# Altium PCB PCB1 MK2.PcbDoc
Units mil, origin at the board's own origin, x right, y up, seen from the top; angles counter-clockwise.
Board outline 2700 x 3875 mil, 2 copper layers (Top Layer, Bottom Layer); 17 components, 38 nets, 80 pads, 0 vias.
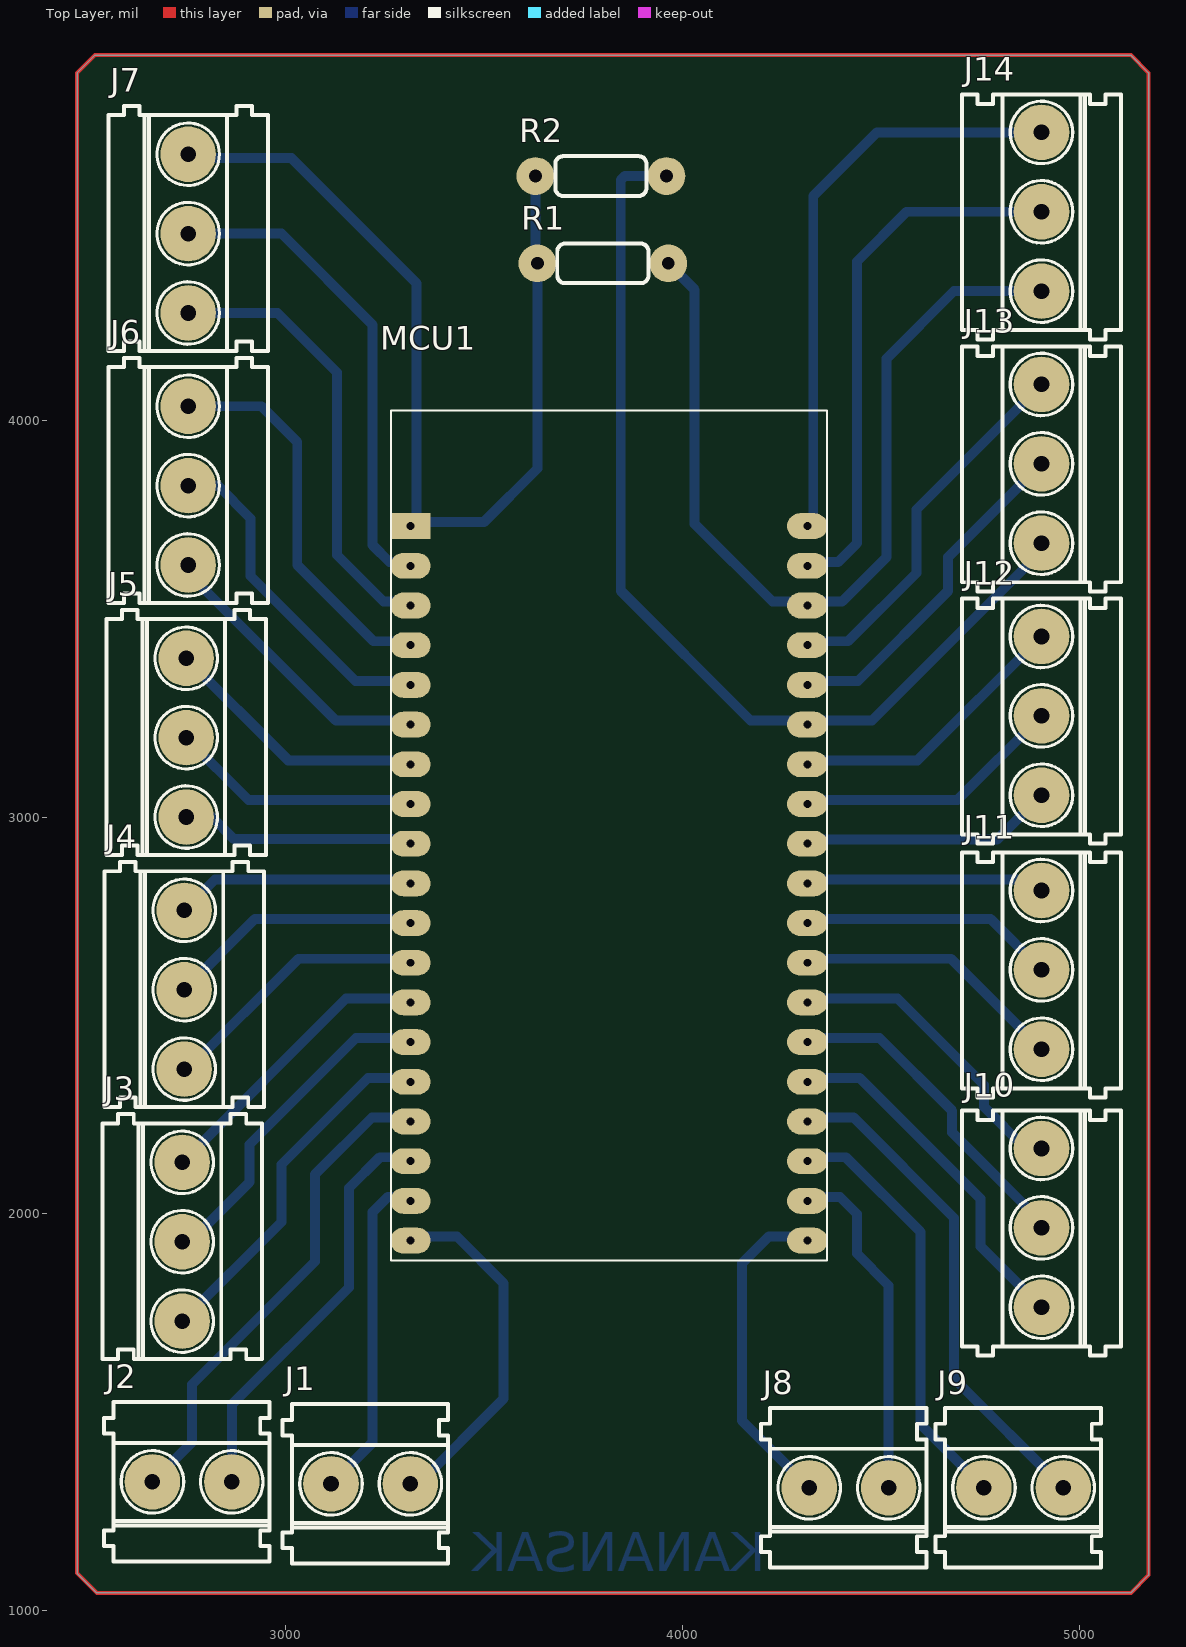
[diagram p0: Top Layer view]
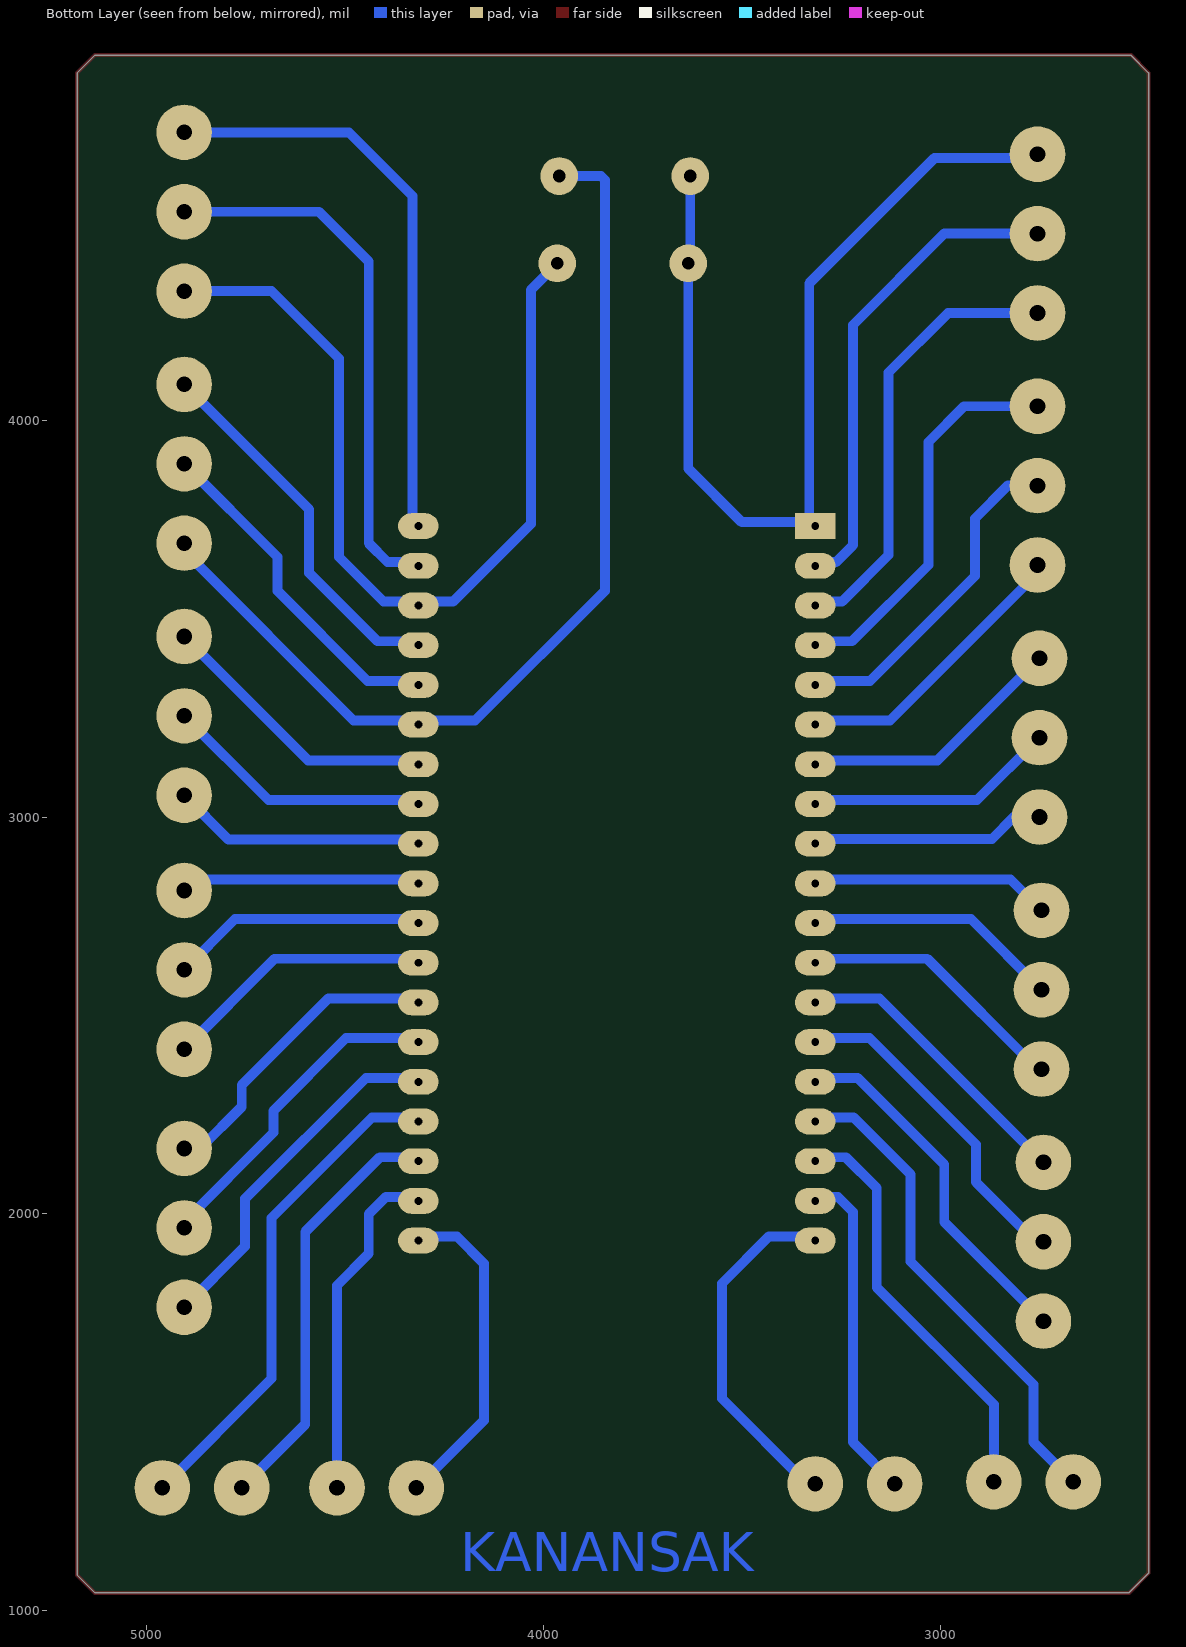
[diagram p1: Bottom Layer view, seen from below]

## Layer stack, top to bottom
Top Solder: solder mask 0.4, Solder Resist, Dk 3.5
Top Layer: signal copper 1.4
Dielectric 1: dielectric 12.6, FR-4, Dk 4.8
Bottom Layer: signal copper 1.4
Bottom Solder: solder mask 0.4, Solder Resist, Dk 3.5

## Board outline
2475,1095 2475,4875 2520,4920 5130,4920 5175,4875 5175,1090 5130,1045 2525,1045

## Design rules (kind name [scope] priority, off if disabled: settings)
Clearance [All] p1: gap=10 ignorepadtopadclearanceinfootprint=FALSE except(0: Arc-Hole Track-Hole SMDPad-Hole THPad-Hole Via-Hole Fill-Hole Poly-Hole Region-Hole Text-Hole)
PolygonConnect [All] p1: connectstyle=Relief reliefconductorwidth=10 reliefentries=4 polygonreliefangle="90 Angle" airgapwidth=10
RoutingLayers [All] p1: top layer_v5=FALSE bottom layer_v5=TRUE
RoutingVias [All] p1: holewidth=28 width=50 viastyle="Through Hole" minholewidth=28 minwidth=50 maxholewidth=28 maxwidth=50
SolderMaskExpansion [All] p1: expansion=4
Width [All] p1: maxlimit=30 minlimit=20 preferedwidth=25 minimp=50.000000 maximp=50.000000 favimp=50.000000
29 further rules are at their usual default settings.

## Components (designator, comment, footprint, x,y, rotation, side; value= is the part's Value field where it differs from the comment)
J1 "" "TB_200Mil 2 P" 3115,1320 r0 top
J2 "" "TB_200Mil 2 P" 2665,1325 r0 top
J3 "" "TB_200Mil 3 P" 2740,2130 r270 top
J4 "" "TB_200Mil 3 P" 2745,2765 r270 top
J5 "" "TB_200Mil 3 P" 2750,3400 r270 top
J6 "" "TB_200Mil 3 P" 2755,4035 r270 top
J7 "" "TB_200Mil 3 P" 2755,4670 r270 top
J8 "" "TB_200Mil 2 P" 4320,1310 r0 top
J9 "" "TB_200Mil 2 P" 4760,1310 r0 top
J10 "" "TB_200Mil 3 P" 4905,1765 r90 top
J11 "" "TB_200Mil 3 P" 4905,2415 r90 top
J12 "" "TB_200Mil 3 P" 4905,3055 r90 top
J13 "" "TB_200Mil 3 P" 4905,3690 r90 top
J14 "" "TB_200Mil 3 P" 4905,4325 r90 top
MCU1 "ESP32-DEVKITC-32D" MODULE_ESP32-DEVKITC-32D 3815,2955 r0 top
R1 "4.7K" 4.7K 3965,4395 r180 top
R2 "4.7K" 4.7K 3960,4615 r180 top

## Footprints (in the part's own frame and the unit in brackets; to place one, negate y for a bottom-side part, rotate by r counter-clockwise, add the part's x,y. Pads: shape width x height; smd on the part's side, far side on the other; paste and mask are expansions set on the pad)
4.7K [mil]
  round 95 hole 32: 1(0,0) 2(330,0)
  silkscreen extent 50,-50 280,50, body extent -47,-48 377,50, height 38
MODULE_ESP32-DEVKITC-32D [mil]
  rect 101.81x65 hole 20: 1(-500,777.95)
  oval 101.81x65 hole 20: 2(-500,677.95) 3(-500,577.95) 4(-500,477.95) 5(-500,377.95) 6(-500,277.95) 7(-500,177.95) 8(-500,77.95) 9(-500,-22.05) 10(-500,-122.05) 11(-500,-222.05) 12(-500,-322.05) 13(-500,-422.05) 14(-500,-522.05) 15(-500,-622.05) 16(-500,-722.05) 17(-500,-822.05) 18(-500,-922.05) 19(-500,-1022.05) 20(500,777.95) 21(500,677.95) 22(500,577.95) 23(500,477.95) 24(500,377.95) 25(500,277.95) 26(500,177.95) 27(500,77.95) 28(500,-22.05) 29(500,-122.05) 30(500,-222.05) 31(500,-322.05) 32(500,-422.05) 33(500,-522.05) 34(500,-622.05) 35(500,-722.05) 36(500,-822.05) 37(500,-922.05) 38(500,-1022.05)
  silkscreen extent -549,-1073 549,1069, body extent -550,-976 550,1193, height 128
"TB_200Mil 2 P" [mil]
  round 140 hole 39.37: 1(0,0) 2(200,0)
  silkscreen extent -122,-201 295,201, body extent -121,-202 296,200, height 551
"TB_200Mil 3 P" [mil]
  round 140 hole 39.37: 1(0,0) 2(200,0) 3(400,0)
  silkscreen extent -122,-201 495,201, body extent -121,-203 493,199, height 551

## Part data
J1 J2 J8 J9: library part "TB 2 PIN"
J3 J4 J5 J6 J7 J10 J11 J12 J13 J14: library part "TB 3 PIN"
MCU1: "EVAL BOARD FOR ESP-WROOM-32"

## Nets (pads, with @x,y where several pads share a name; then routed paths per layer and width w, separated by ;. In a path a pad name is that pad's centre, name@x,y a point inside that pad or via, vN(x,y) a via of type N, cw(c..) or ccw(c..) an arc to the next point about the centre after c; other vN are vias at no path point)
NetJ1_1: J1.1 MCU1.18 | length 854.2
  Bottom Layer w25: J1.1 3220,1425 3220,2005 3257.95,2042.95 MCU1.18@3330,2042.95
NetJ1_2: J1.2 MCU1.19 | length 882.9
  Bottom Layer w25: J1.2 3335,1320 3550,1535 3550,1825 3432.05,1942.95 MCU1.19@3330,1942.95
NetJ2_1: J2.1 MCU1.16 | length 1259
  Bottom Layer w25: J2.1 2765,1425 2765,1570 3075,1880 3075,2100 3217.95,2242.95 MCU1.16@3330,2242.95
NetJ2_2: J2.2 MCU1.17 | length 1064.5
  Bottom Layer w25: J2.2 2865,1520 3160,1815 3160,2065 3237.95,2142.95 MCU1.17@3330,2142.95
NetJ3_1: J3.1 MCU1.13 | length 761.1
  Bottom Layer w25: J3.1 3152.95,2542.95 MCU1.13@3330,2542.95
NetJ3_2: J3.2 MCU1.14 | length 907.3
  Bottom Layer w25: J3.2@2705,1930 J3.2 ; J3.2@2730,1940 J3.2 ; MCU1.14@3330,2442.95 3177.95,2442.95 2910,2175 2910,2080 2760,1930 J3.2
NetJ3_3: J3.3 MCU1.15 | length 928.8
  Bottom Layer w25: J3.3 2990,1980 2990,2125 3207.95,2342.95 MCU1.15@3330,2342.95
NetJ4_1: J4.1 MCU1.10 | length 617.3
  Bottom Layer w25: J4.1 2822.95,2842.95 MCU1.10@3330,2842.95
NetJ4_2: J4.2 MCU1.11 | length 658.7
  Bottom Layer w25: J4.2 2922.95,2742.95 MCU1.11@3330,2742.95
NetJ4_3: J4.3 MCU1.12 | length 700.1
  Bottom Layer w25: J4.3 2755,2365 3032.95,2642.95 MCU1.12@3330,2642.95
NetJ5_1: J5.1 MCU1.7 | length 686.5
  Bottom Layer w25: J5.1 3007.05,3142.95 MCU1.7@3330,3142.95
NetJ5_2: J5.2 MCU1.8 | length 645.1
  Bottom Layer w25: J5.2 2907.05,3042.95 MCU1.8@3330,3042.95
NetJ5_3: J5.3 MCU1.9 | length 603.6
  Bottom Layer w25: J5.3 2815,3000 2870,2945 3327.95,2945 MCU1.9@3330,2942.95
NetJ6_1: J6.1 MCU1.4 | length 1001.8
  Bottom Layer w25: J6.1 2940,4035 3030,3945 3030,3635 3222.05,3442.95 MCU1.4@3330,3442.95
NetJ6_2: J6.2 MCU1.5 | length 863.8
  Bottom Layer w25: J6.2 2830,3835 2912.5,3752.5 2912.5,3607.5 3177.05,3342.95 MCU1.5@3330,3342.95
NetJ6_3: J6.3 MCU1.6 | length 749.1
  Bottom Layer w25: J6.3 2755,3615 3127.05,3242.95 MCU1.6@3330,3242.95
NetJ7_1: J7.1 MCU1.1 R1.2 R2.2 | length 2411.7
  Bottom Layer w25: J7.1 2765,4660 3015,4660 3330,4345 3330,3742.95 3500,3742.95 3635,3877.95 R1.2 3630,4400 R2.2
NetJ7_2: J7.2 MCU1.2 | length 1242.7
  Bottom Layer w25: J7.2 2990,4470 3220,4240 3220,3685 3262.05,3642.95 MCU1.2@3330,3642.95
NetJ7_3: J7.3 MCU1.3 | length 1145.6
  Bottom Layer w25: J7.3 2980,4270 3130,4120 3130,3660 3247.05,3542.95 MCU1.3@3330,3542.95
NetJ8_1: J8.1 MCU1.38 | length 843.6
  Bottom Layer w25: J8.1 4150,1480 4150,1875 4217.95,1942.95 MCU1.38@4330,1942.95
NetJ8_2: J8.2 MCU1.37 | length 850.9
  Bottom Layer w25: MCU1.37@4330,2042.95 4397.05,2042.95 4440,2000 4440,1900 4520,1820 J8.2
NetJ9_1: J9.1 MCU1.36 | length 1059.1
  Bottom Layer w25: MCU1.36@4330,2142.95 4412.05,2142.95 4600,1955 4600,1470 J9.1
NetJ9_2: J9.2 MCU1.35 | length 1253.7
  Bottom Layer w25: MCU1.35@4330,2242.95 4432.05,2242.95 4685,1990 4685,1585 J9.2
NetJ10_1: J10.1 MCU1.34 | length 884.7
  Bottom Layer w25: MCU1.34@4330,2342.95 4447.05,2342.95 4751.5,2038.5 4751.5,1918.5 J10.1
NetJ10_2: J10.2 MCU1.33 | length 819
  Bottom Layer w25: MCU1.33@4330,2442.95 4497.05,2442.95 4680,2260 4680,2205 J10.2@4905,1980 ; J10.2 J10.2@4905,1980 ; J10.2@4905,1985 J10.2@4905,1980
NetJ10_3: J10.3 MCU1.32 | length 763.8
  Bottom Layer w25: MCU1.32@4330,2542.95 4542.05,2542.95 4760,2325 4760,2270 4865,2165 J10.3
NetJ11_1: J11.1 MCU1.31 | length 669.4
  Bottom Layer w25: MCU1.31@4330,2642.95 4677.05,2642.95 J11.1
NetJ11_2: J11.2 MCU1.30 | length 628
  Bottom Layer w25: MCU1.30@4330,2742.95 4777.05,2742.95 J11.2
NetJ11_3: J11.3 MCU1.29 | length 586.6
  Bottom Layer w25: MCU1.29@4330,2842.95 4877.05,2842.95 J11.3
NetJ12_1: J12.1 MCU1.28 | length 621.4
  Bottom Layer w25: MCU1.28@4330,2942.95 4792.95,2942.95 J12.1
NetJ12_2: J12.2 MCU1.27 | length 662.8
  Bottom Layer w25: MCU1.27@4330,3042.95 4692.95,3042.95 J12.2
NetJ12_3: J12.3 MCU1.26 | length 704.3
  Bottom Layer w25: MCU1.26@4330,3142.95 4592.95,3142.95 J12.3
NetJ13_1: J13.1 MCU1.25 R2.1 | length 2546.5
  Bottom Layer w25: R2.1 3855,4615 3845,4605 3845,3570 4172.05,3242.95 4330,3242.95 4477.95,3242.95 4905,3670 J13.1
NetJ13_2: J13.2 MCU1.24 | length 851.4
  Bottom Layer w25: MCU1.24@4330,3342.95 4442.95,3342.95 4670,3570 4670,3655 J13.2
NetJ13_3: J13.3 MCU1.23 | length 936.7
  Bottom Layer w25: MCU1.23@4330,3442.95 4417.95,3442.95 4590,3615 4590,3775 J13.3
NetJ14_1: J14.1 MCU1.22 R1.1 | length 2255.7
  Bottom Layer w25: R1.1 4031.47,4328.53 4031.12,4328.18 4031.12,3738.88 4227.05,3542.95 4330,3542.95 4402.95,3542.95 4515,3655 4515,4155 4685,4325 J14.1
NetJ14_2: J14.2 MCU1.21 | length 1356.3
  Bottom Layer w25: MCU1.21@4330,3642.95 4392.95,3642.95 4440,3690 4440,4400 4565,4525 J14.2
NetJ14_3: J14.3 MCU1.20 | length 1463.3
  Bottom Layer w25: MCU1.20@4330,3742.95 4330,4565 4490,4725 J14.3
copper on no net: | length 13041.6
  Top Layer w10: 2475,1095 2525,1045 5130,1045 5175,1090 5175,4875 5130,4920 2520,4920 2475,4875 2475,1095

## Other copper
Bottom Layer:
  text "KANANSAK" at 4210,1100 h98.43